# Altium PCB PCB.PcbDoc
Units mm, origin at the board's own origin, x right, y up, seen from the top; angles counter-clockwise.
Board outline 145.54 x 89.03 mm, 2 copper layers (Top Layer, Bottom Layer); 26 components, 19 nets, 79 pads, 0 vias.
Unrouted connection lines stored in the file: 3.
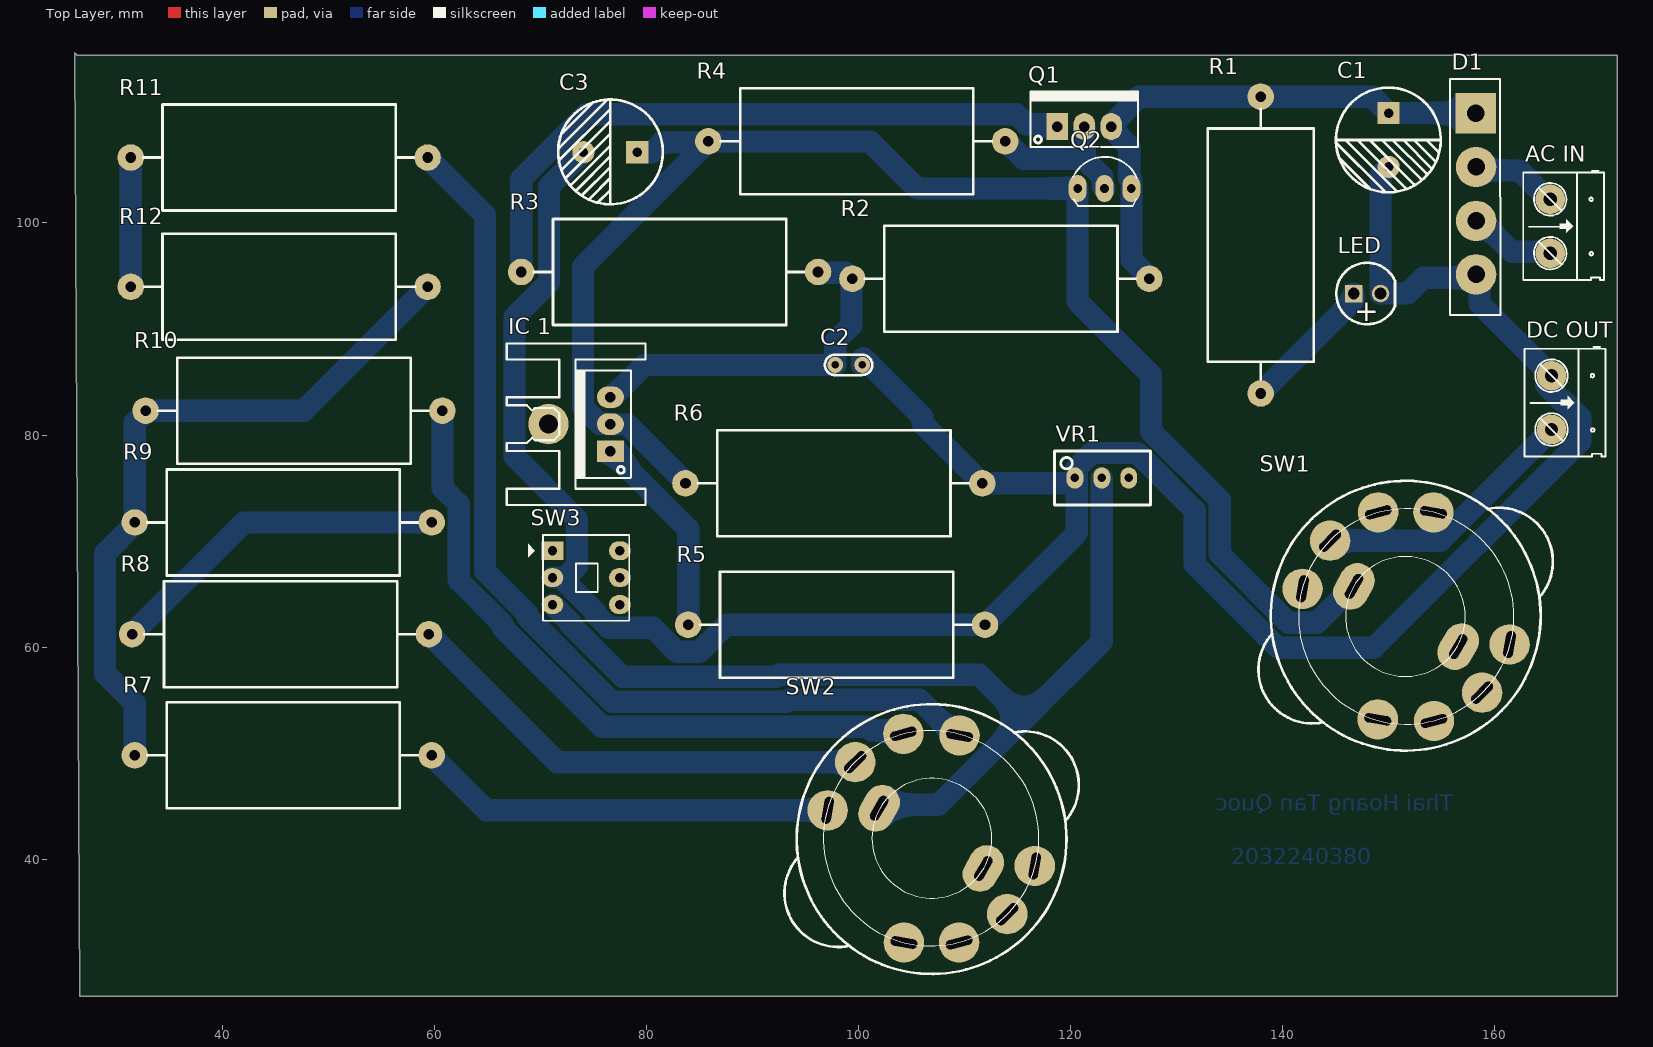
[diagram p0: Top Layer view]
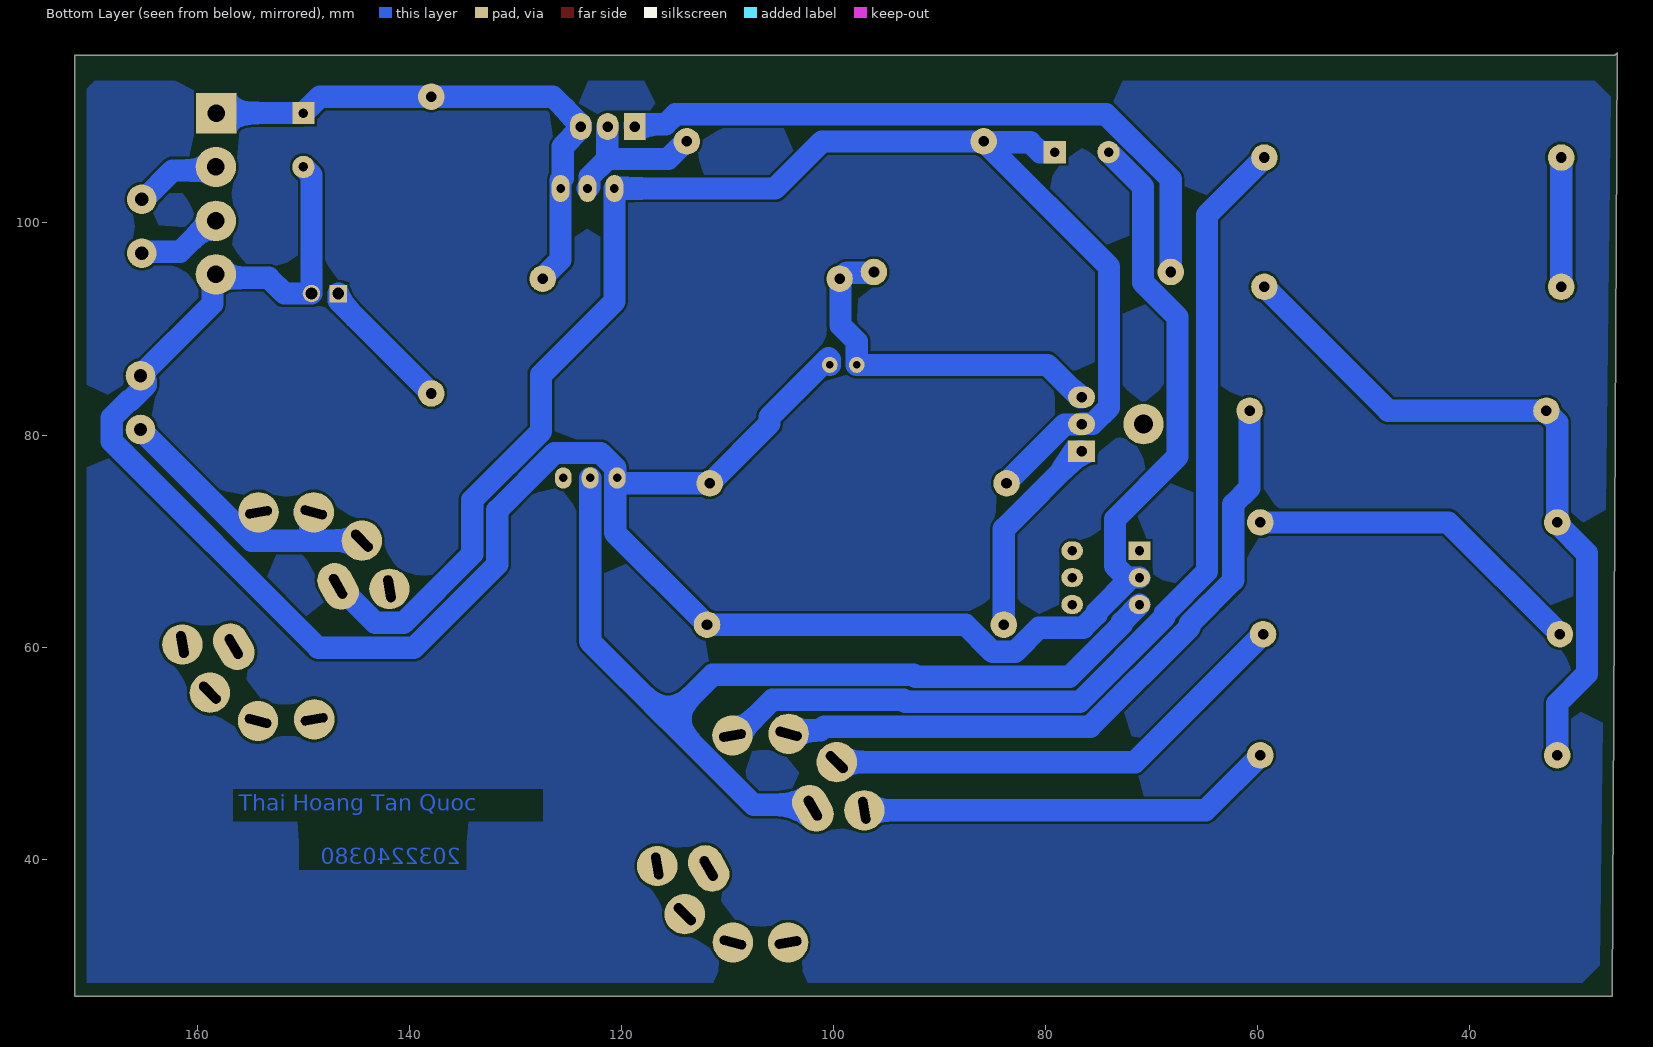
[diagram p1: Bottom Layer view, seen from below]
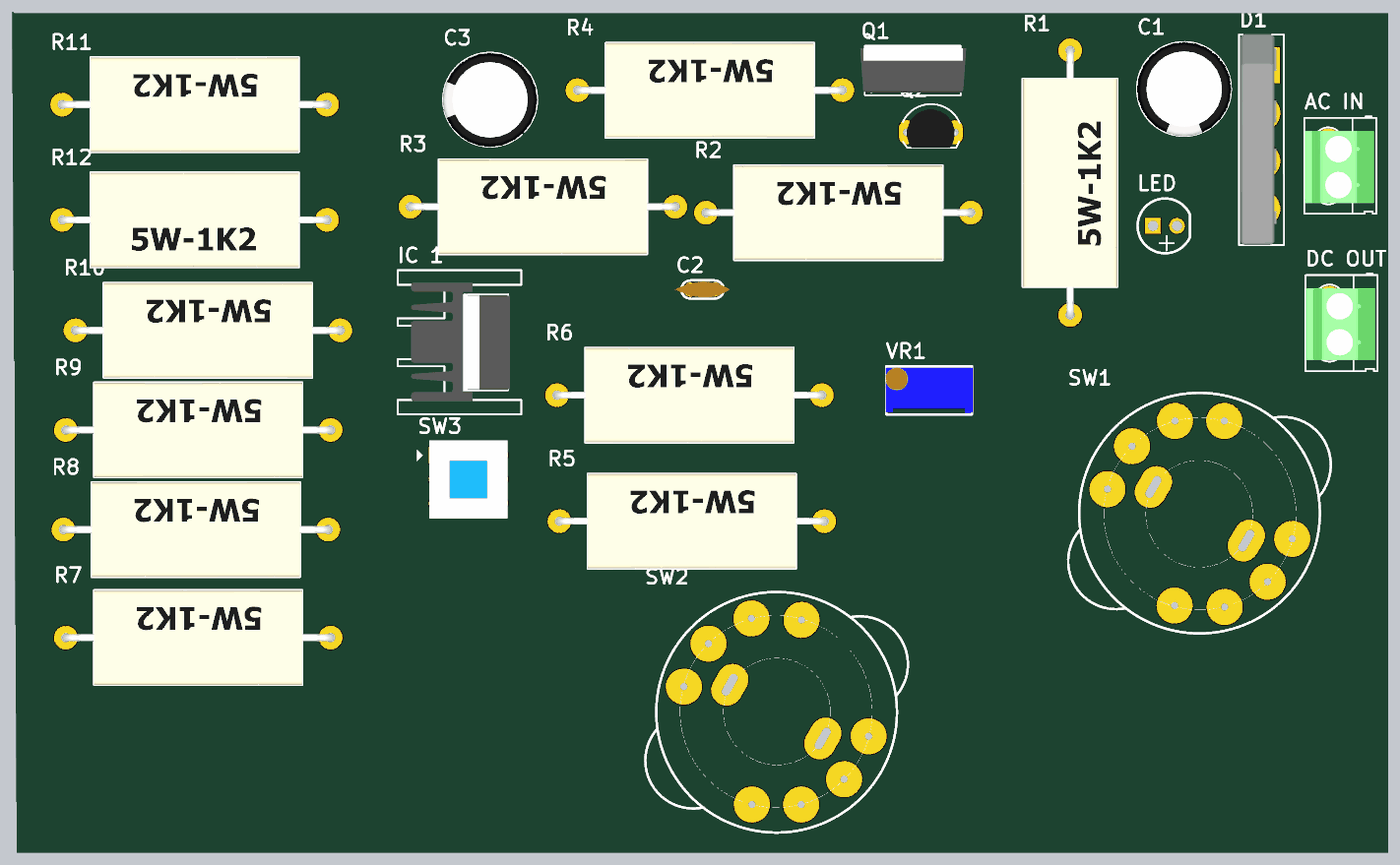
[diagram p2: 3D render of the assembled board from above, using the file's embedded part models]

## Layer stack, top to bottom
Top Solder: solder mask 0.0102, Solder Resist, Dk 3.5
Top Layer: signal copper 0.0356
Dielectric 1: dielectric 0.32, FR-4, Dk 4.8
Bottom Layer: signal copper 0.0356
Bottom Solder: solder mask 0.0102, Solder Resist, Dk 3.5

## Board outline
26.035,116.078 26.289,115.824 171.577,115.824 171.577,27.051 26.53,27.051

## Design rules (kind name [scope] priority, off if disabled: settings)
Clearance [All] p1: gap=0.254 ignorepadtopadclearanceinfootprint=FALSE
PolygonConnect [All] p1: connectstyle=Relief reliefconductorwidth=0.254 reliefentries=4 polygonreliefangle="90 Angle" airgapwidth=0.254
RoutingVias [All] p1: holewidth=0.711 width=1.27 viastyle="Through Hole" minholewidth=0.711 minwidth=1.27 maxholewidth=0.711 maxwidth=1.27
SolderMaskExpansion [All] p1: expansion=0.102 istentingtop=FALSE
SupplyNets "Schematic Supply Nets_1" [InNet('GND')] p1: voltage=0.000
SupplyNets "Schematic Supply Nets" [InNet('VCC')] p2: voltage=0.000
Width [All] p1: maxlimit=2.3 minlimit=0.254 preferedwidth=2.2 toplayer_maxwidth=0.254 toplayer_prefwidth=0.254 bottomlayer_minwidth=2.1 minimp=50.000000 maximp=50.000000 favimp=50.000000
30 further rules are at their usual default settings.

## Components (designator, comment, footprint, x,y, rotation, side; value= is the part's Value field where it differs from the comment)
"AC IN" "CON 2 KF301" "Con 2 KF301 5.08" 165.227,102.235 r270 top
C1 "6800uF" "tu hoa 10mm" 149.987,107.823 r270 top
C2 "0.01uF" "tu gom" 99.06,86.614 r0 top
C3 "33uF" "tu hoa 10mm" 76.581,106.68 r180 top
D1 "Diode Brideg" "DIO-Bri 5A" 158.242,110.363 r270 top value="Cau 1A"
"DC OUT" "CON 2 KF301" "Con 2 KF301 5.08" 165.354,85.598 r270 top
"IC 1" "LM317" TO220H1 76.581,81.026 r90 top
LED "LED" "LED_phi 5" 147.955,93.345 r0 top
Q1 "TIP42C" QTO-220 118.745,109.093 r0 top
Q2 "?" TO92 123.19,103.251 r0 top value=C9014
R1 "1K" "tro cong suat 5w" 137.922,97.917 r90 top
R2 "15" "tro cong suat 5w" 113.411,94.742 r180 top
R3 "150" "tro cong suat 5w" 82.169,95.377 r180 top
R4 "470" "tro cong suat 5w" 99.822,107.696 r180 top
R5 "15K" "tro cong suat 5w" 97.917,62.103 r180 top
R6 "150" "tro cong suat 5w" 97.663,75.438 r180 top
R7 "220" "tro cong suat 5w" 45.72,49.784 r180 top
R8 "560" "tro cong suat 5w" 45.466,61.214 r180 top
R9 "33" "tro cong suat 5w" 45.72,71.755 r180 top
R10 "1K" "tro cong suat 5w" 46.736,82.296 r180 top
R11 "1K2" "tro cong suat 5w" 45.339,106.172 r180 top
R12 "120" "tro cong suat 5w" 45.339,93.98 r0 top
SW1 "Switch 4x2" SW4X2 151.638,62.865 r0 top
SW2 "Switch 4x2" SW4X2 106.846,41.973 r180 top
SW3 "SW6A" SW6 71.12,69.088 r0 top value=SW6
VR1 "1K" "Bien Tro Vi Chinh Dung" 122.936,75.946 r0 top

## Footprints (in the part's own frame and the unit in brackets; to place one, negate y for a bottom-side part, rotate by r counter-clockwise, add the part's x,y. Pads: shape width x height; smd on the part's side, far side on the other; paste and mask are expansions set on the pad)
"Bien Tro Vi Chinh Dung" [mm] "Bien tro vi chinh"
  oval 1.6x2 hole 0.8: 1(-2.54,0) 2(0,0) 3(2.54,0)
  silkscreen extent -4.47,-2.54 4.6,2.54, body extent -4.54,-2.4 4.66,2.4, height 12.02
"Con 2 KF301 5.08" [mil]
  round 110 hole 50: 1(0,0) 2(200,0)
  silkscreen extent -106,-100 300,200, body extent -45,-97 255,190, height 335
"DIO-Bri 5A" [mil] "Brigde 5A"
  rect 150x150 hole 65: 1(0,-2)
  round 150 hole 65: 2(200,0) 3(400,0) 4(599,0)
  silkscreen extent -127,-97 750,90, body extent -129,-90 749,58, height 937
"LED_phi 5" [mil] "LED phi 5mm"
  rect 65x65 hole 43.31: 1(-50,0)
  round 65 hole 43.31: 2(50,0)
  silkscreen extent -114,-114 104,114
QTO-220 [mil] "TO-220 - 1-2-3"
  rect 80x100 hole 39: 1(0,0)
  oval 80x100 hole 39: 2(100,0) 3(200,0)
  silkscreen extent -100,-76 300,130, body extent -119,-64 322,121, height 755
SW4X2 [mil] "Switch 4x2"
  oval 180x130 hole 35 slot 100 at 60 deg rot 60: 1(-193.57,112.51) 6(193.7,-111.07)
  round 150 hole 35 slot 100 at 80 deg: 2(-384.48,103.48) 7(384.48,-103.48)
  round 150 hole 35 slot 100 at 45 deg: 3(-282.26,282.26) 8(282.26,-282.26)
  round 150 hole 35 slot 100 at 15 deg: 4(-103.48,387.48) 9(103.48,-387.48)
  round 150 hole 35 slot 100 at 170 deg: 5(101.54,387.46) 10(-105.2,-381.27)
  silkscreen extent -548,-498 545,504
SW6 [mil] "SW DTDP - 6Pin 260x300x300 mil"
  rect 80x70 hole 35: 1(0,0)
  oval 80x70 hole 35: 2(0,-100) 3(0,-200) 4(250,-200) 5(250,-100) 6(250,0)
  silkscreen extent -90,-260 285,58, body extent -33,-259 281,55, height 532
TO92 [mil] "TO-92"
  oval 66x100 hole 32: 1(-100,0) 2(0,0) 3(100,0)
  silkscreen extent -117,-65 120,118, body extent -109,-66 109,95, height 245
TO220H1 [mil] "TO-220 - 1-2-3"
  round 150 hole 70: 0(0,230)
  rect 80x100 hole 39: 1(-100,0)
  oval 80x100 hole 39: 2(0,0) 3(100,0)
  silkscreen extent -300,-130 300,385, body extent -246,-82 250,329, height 1000
"tro cong suat 5w" [mm]
  round 2.5 hole 1: 1(-14,0) 2(14,0)
  silkscreen extent -12.7,-5 12.83,5, body extent -14.34,-5 14.35,5, height 9
"tu gom" [mm] "Tu gom mini"
  round 1.5 hole 0.7: 1(-1.27,0) 2(1.27,0)
  silkscreen extent -2.25,-0.97 2.22,0.97, body extent -2.92,-0.85 2.92,0.85, height 6.12
"tu hoa 10mm" [mm]
  rect 2.1x2.1 hole 0.9: 1(-2.54,0)
  round 2.1 hole 0.9: 2(2.54,0)
  silkscreen extent -4.95,-4.96 4.93,4.92, body extent -5,-5 4.97,5, height 20.01

## Part data
"AC IN" "DC OUT": "Cắm", Chung_Loai=Cắm, Don_Vi=Con, Ma_Hang=MH000987, Ten_Linh_Kien="CON 2 KF301-2P 5.08MM Xanh Dương"
C1 C3: library part "Tu Hoa 220uF 50V 10x14", "Cắm", Chung_Loai=Cắm, Don_Vi=Con, Ma_Hang=MH006873, So_Chan=2, Ten_Linh_Kien="Tụ Hóa 220uF 50V"
C2: library part "Tu gom 104 50V", "Cắm", Chung_Loai=Cắm, Don_Vi=Con, Ma_Hang=MH004761, So_Chan=2, Ten_Linh_Kien="Tụ gốm 104 100nF 50V"
D1: library part "DIODE BRIGDE", "Convert AC to DC voltage, 4 pin"
"IC 1": library part "LM317 TO220", "Cắm", Chung_Loai=Cắm, Don_Vi=Con, Ma_Hang=MH003115, Ten_Linh_Kien="LM317T TO220 REG LDO ADJ 1.5A"
LED: library part "LED_phi 5"
Q1: "PNP 2W, BCE"
Q2: library part "Trans 2N3904", "NPN transistor EBC"
R1 R2 R3 R4 R5 R6 R7 R8 R9 R10 R11 R12: library part "Tro Cong Suat 5W 5% 0.05R", "Cắm", Chung_Loai=Cắm, Don_Vi=Con, Ma_Hang=MH001093, So_Chan=2, Ten_Linh_Kien="Trở Sứ 5w 5% 0.05R"
SW1 SW2: library part SW4x2
SW3: "SW-DTDP - 6 Pin"
VR1: library part "Bien Tro Tinh Chinh 1K Dung", "Cắm", Chung_Loai=Cắm, Don_Vi=Con, Ma_Hang=MH003234, Ten_Linh_Kien="Biến Trở VR 102-1K 3296W"

## Nets (pads, with @x,y where several pads share a name; then routed paths per layer and width w, separated by ;. In a path a pad name is that pad's centre, name@x,y a point inside that pad or via, vN(x,y) a via of type N, cw(c..) or ccw(c..) an arc to the next point about the centre after c; other vN are vias at no path point)
GND: "DC OUT.1" C1.2 C2.2 C3.2 D1.4 LED.2 R5.1 R6.1 SW3.2 VR1.1 | length 244.6
  Bottom Layer w2.1: SW3.2 SW3.2@71.808,66.548 ; C3.2 70.786,103.425 70.786,94.382 67.53,91.126 67.53,77.962 73.44,72.052 73.44,67.659 72.329,66.548 SW3.2@71.808,66.548 ; C2.2 100.33,87.122 100.457,87.249 106.022,81.684 106.022,81.079 R6.1 119.888,75.438 VR1.1 120.582,76.132 120.582,76.921 121.961,78.3 126.298,78.3 131.708,72.89 131.708,67.791 139.568,59.93 148.586,59.93 168.055,79.399 168.055,81.637 166.473,83.219 166.336,83.219 164.846,84.709 164.846,85.09 165.354,85.598 158.569,92.383 158.569,94.821 D1.4 157.915,94.821 153.252,94.821 151.776,93.345 LED.2 149.225,104.521 C1.2 ; VR1.1@120.582,75.838 120.582,70.768 R5.1 87.529,62.103 84.975,59.549 82.859,59.549 80.593,61.815 76.435,61.815 75.15,63.1 75.15,63.307 71.909,66.548 SW3.2@71.808,66.548
"NetAC IN_1": "AC IN.1" D1.2 | length 8.2
  Bottom Layer w2.1: D1.2 158.569,104.956 162.318,104.956 165.039,102.235 165.227,102.235
"NetAC IN_2": "AC IN.2" D1.3 | length 8.2
  Bottom Layer w2.1: D1.3 158.705,100.203 161.62,97.288 165.094,97.288 165.227,97.155
NetC2_1: "IC 1.3" C2.1 R2.2 R3.1 | length 34.8
  Bottom Layer w2.1: 76.581,83.566 76.767,83.566 79.815,86.614 C2.1 97.79,88.813 99.334,90.357 99.334,94.665 R2.2 99.303,94.742 98.744,95.3 96.246,95.3 R3.1
NetC3_1: "IC 1.2" C3.1 Q2.1 R4.2 R6.2 SW1.1 | length 143.2
  Bottom Layer w2.1: C3.1 80.498,106.68 81.437,107.619 R4.2@85.745,107.619 ; R6.2 83.663,75.534 78.205,80.992 76.615,80.992 76.581,81.026 76.547,81.06 75.552,81.06 74.007,82.605 74.007,95.881 R4.2@85.745,107.619 ; SW1.1 146.64,65.723 143.201,62.284 140.543,62.284 134.062,68.766 134.062,73.865 127.58,80.347 127.58,85.674 120.65,92.604 Q2.1 105.517,103.251 101.072,107.696 R4.2 R4.2@85.745,107.619
"NetDC OUT_2": "DC OUT.2" SW1.2 SW1.3 SW1.4 SW1.5 | length 31
  Bottom Layer w2.1: SW1.3 154.87,70.034 ; SW1.4 149.337,72.38 149.337,70.049 149.352,70.034 ; SW1.5 154.544,72.379 154.544,70.36 154.87,70.034 ; 165.354,80.518 154.87,70.034
"NetIC 1_1": "IC 1.1" R5.2 | length 19.5
  Bottom Layer w2.1: 76.581,78.486 76.767,78.486 76.801,78.452 76.801,78.266 83.917,71.15 R5.2
NetLED_1: LED.1 R1.1 | length 13.1
  Bottom Layer w2.1: R1.1 146.685,92.68 LED.1
NetQ1_1: Q1.1 R3.2 | length 62.5
  Bottom Layer w2.1: R3.2 68.169,104.137 74.282,110.25 114.88,110.25 115.817,109.313 118.711,109.313 118.745,109.279 Q1.1
NetQ1_2: Q1.2 Q2.2 R4.1 | length 14.8
  Bottom Layer w2.1: R4.1 113.93,107.696 115.583,106.043 121.319,106.043 ; Q1.2 121.319,109.059 121.319,106.043 ; Q2.2 123.004,103.437 123.004,104.358 121.319,106.043
NetR7_1: R7.1 SW2.7 | length 39.5
  Bottom Layer w2.1: R7.1 64.903,44.601 SW2.7
NetR7_2: R7.2 R9.2 R10.2 R12.2 | length 66.7
  Bottom Layer w2.1: R7.2 31.72,54.678 28.912,57.486 28.912,68.839 31.72,71.647 R9.2 31.72,81.172 32.736,82.188 R10.2 47.655,82.296 R12.2
NetR8_1: R8.1 SW2.8 | length 45.2
  Bottom Layer w2.1: R8.1 71.538,49.142 SW2.8
NetR8_2: R8.2 R9.1 | length 32.6
  Bottom Layer w2.1: R8.2 42.007,71.755 R9.1
NetR10_1: R10.1 SW2.9 | length 64.8
  Bottom Layer w2.1: R10.1 60.736,75.011 62.274,73.473 62.274,66.297 66.412,62.159 66.412,61.85 75.775,52.487 100.87,52.487 101.215,52.142 103.89,52.142 SW2.9
NetR11_1: R11.1 SW2.10 | length 92.8
  Bottom Layer w2.1: R11.1 64.75,100.761 64.75,67.15 68.766,63.134 68.766,62.826 76.751,54.841 93.207,54.841 93.39,55.024 105.735,55.024 109.102,51.657 SW2.10
NetR11_2: R11.2 R12.1 | length 12.2
  Bottom Layer w2.1: R12.1 R11.2
NetSW2_6: SW2.6 SW3.1 SW3.3 VR1.2 VR1.3 | length 92.2
  Bottom Layer w2.1: SW3.3 72.796,62.332 72.796,62.125 77.726,57.195 92.232,57.195 92.415,57.378 111.405,57.378 115.591,53.192 ; SW2.6 102.243,45.112 107.51,45.112 115.591,53.192 ; VR1.2 122.936,60.537 115.591,53.192
VCC: C1.1 D1.1 Q1.3 Q2.3 R1.2 R2.1 | length 51.9
  Bottom Layer w2.1: Q1.3 123.825,108.907 125.518,107.214 125.518,104.252 125.73,104.04 125.73,96.531 127.411,94.85 R2.1 ; Q1.3@123.825,109.279 126.463,111.917 R1.2 148.433,111.917 C1.1 D1.1
pads on no net: "IC 1.0" SW1.6 SW1.7 SW1.8 SW1.9 SW1.10 SW2.1 SW2.2 SW2.3 SW2.4 SW2.5 SW3.4 SW3.5 SW3.6

## Polygon pours and split planes (outlines as drawn)
no net on Bottom Layer "NONET_L02_P000" (solid, pour order 0): 26.67,113.411 169.672,113.411 170.434,112.649 170.434,28.321 29.337,28.321 27.686,29.972

## Other copper
Bottom Layer:
  text "Thai Hoang Tan Quoc" at 156.083,44.577 h1.52
  text "2032240380" at 135.128,39.497 h1.52

## Text inside footprints (layer, text, board x,y; h text height)
LED: Top Overlay "+" at 146.761,90.729 h2.03